# Altium PCB OSCILATOR.PcbDoc
Units mm, origin at the board's own origin, x right, y up, seen from the top; angles counter-clockwise.
Board outline 80 x 100 mm, 2 copper layers (Top Layer, Bottom Layer); 42 components, 22 nets, 82 pads, 3 vias.
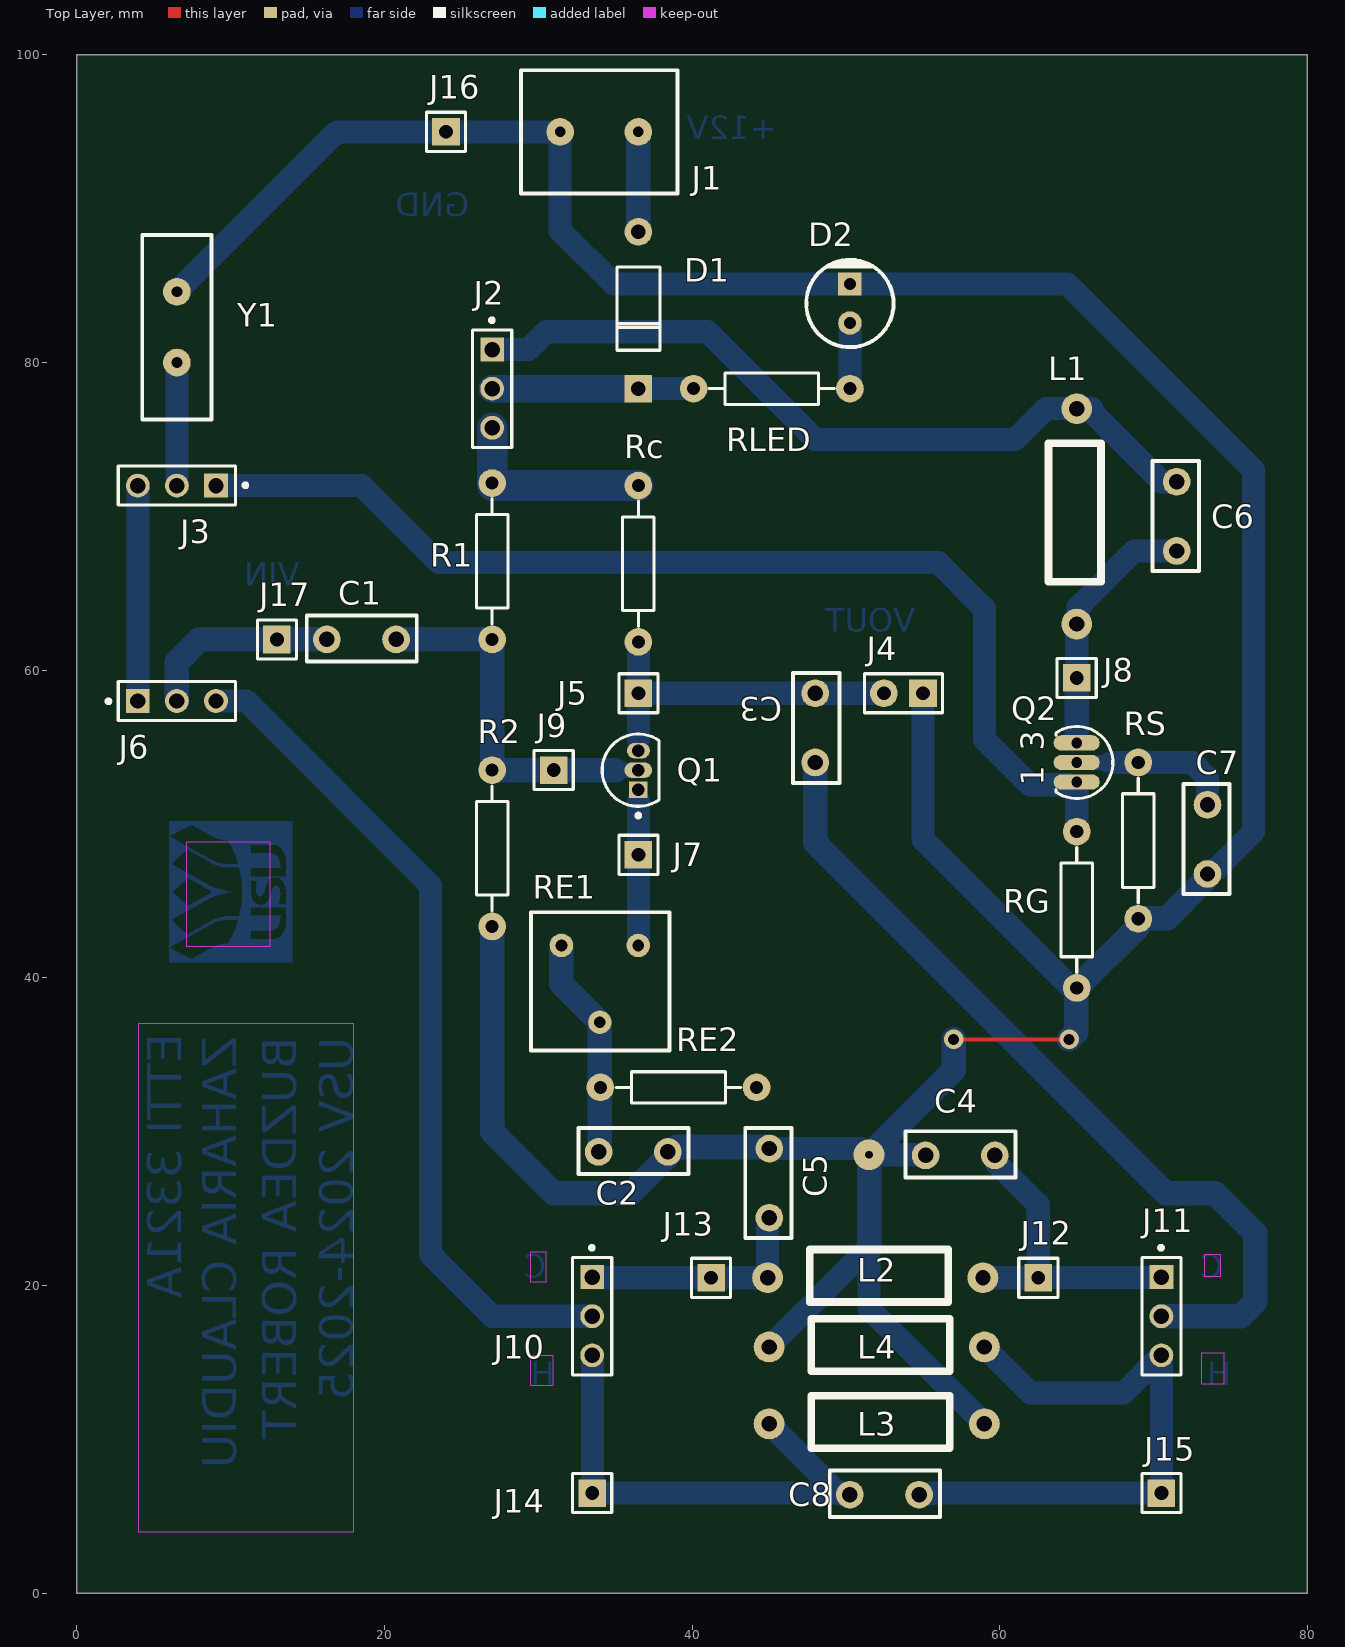
[diagram p0: Top Layer view]
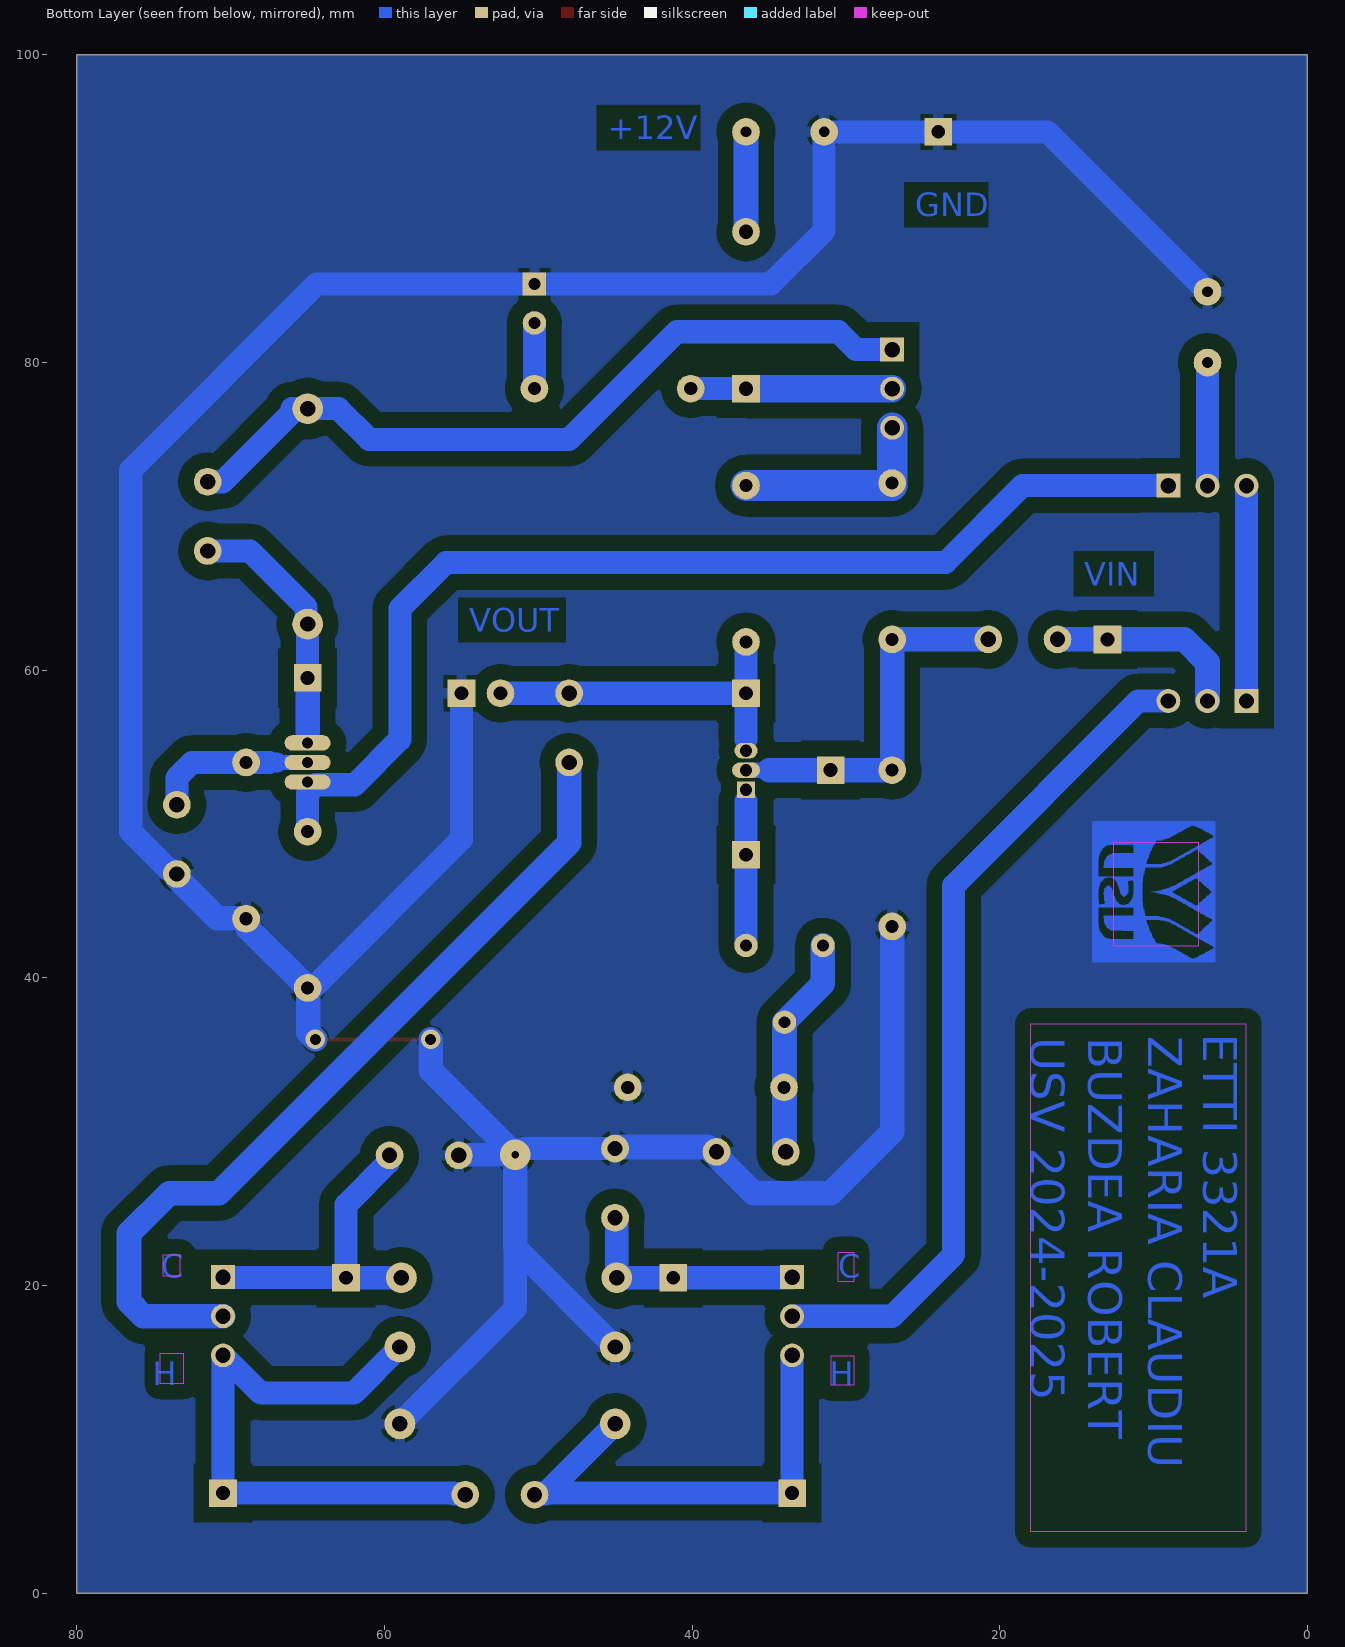
[diagram p1: Bottom Layer view, seen from below]
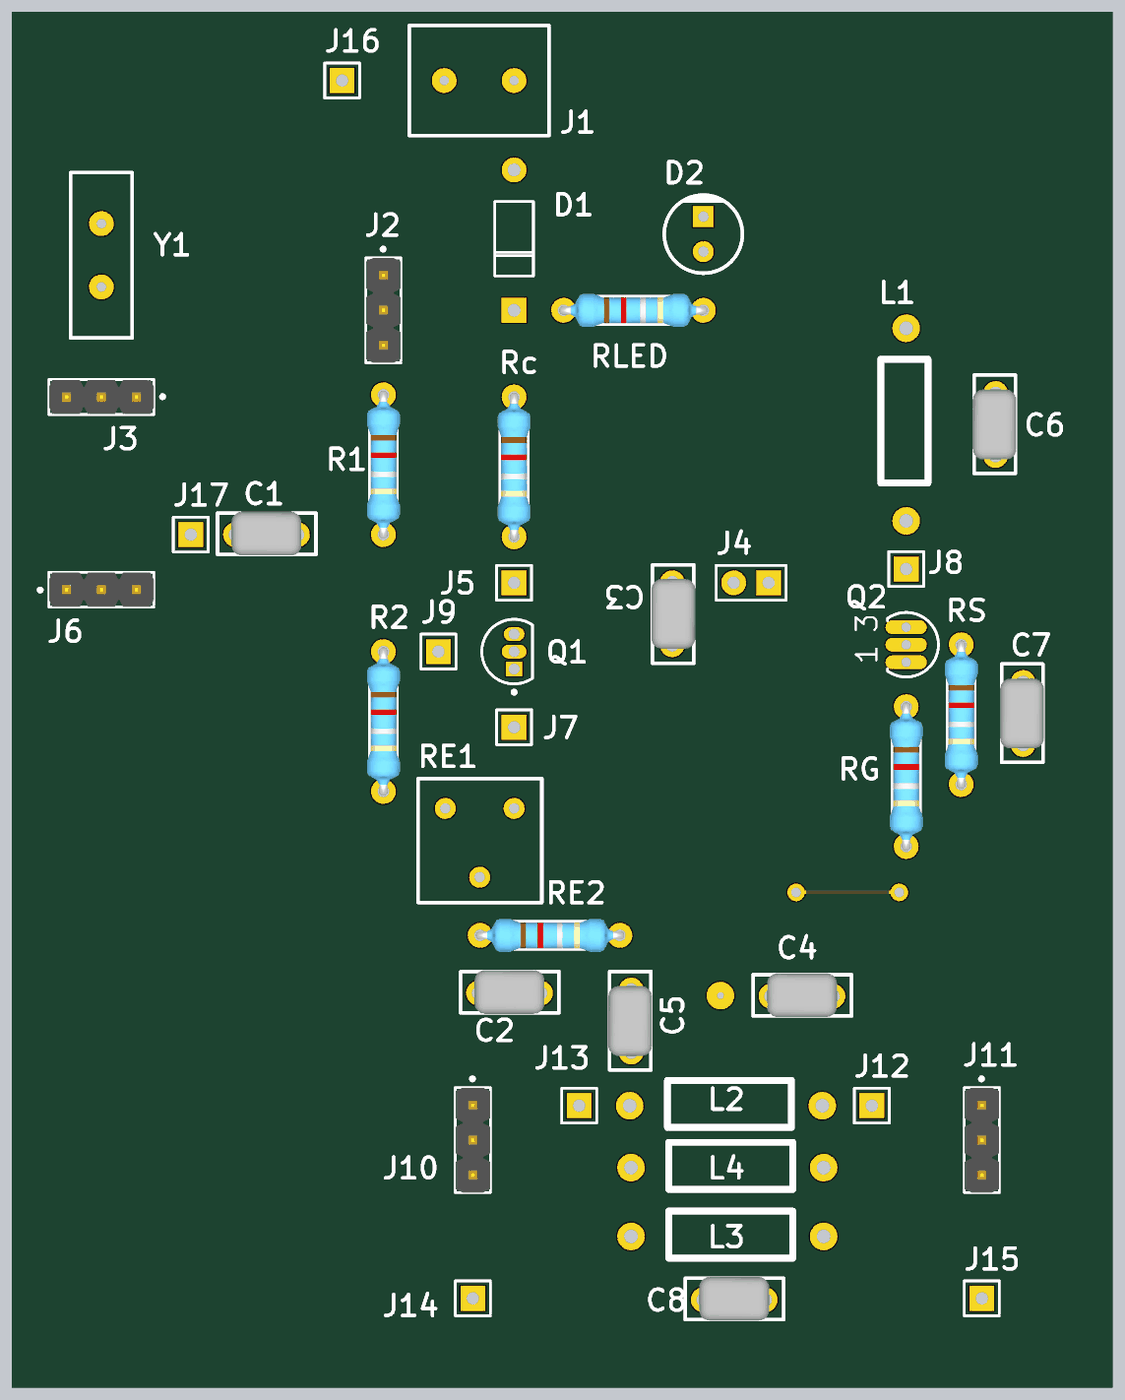
[diagram p2: 3D render of the assembled board from above, using the file's embedded part models]

## Layer stack, top to bottom
Top Solder: solder mask 0.0102, Solder Resist, Dk 3.5
Top Layer: signal copper 0.0356
Dielectric 1: dielectric 0.32, FR-4, Dk 4.8
Bottom Layer: signal copper 0.0356
Bottom Solder: solder mask 0.0102, Solder Resist, Dk 3.5

## Board outline
0,0 80,0 80,100 0,100

## Design rules (kind name [scope] priority, off if disabled: settings)
Clearance [All] p1: gap=0.2 ignorepadtopadclearanceinfootprint=FALSE except(0.1: Arc-Arc Arc-Track Track-Track; 1: Arc-Fill Arc-Poly Arc-Region Track-Fill Track-Poly Track-Region SMDPad-Fill SMDPad-Poly SMDPad-Region THPad-Fill THPad-Poly THPad-Region Via-Fill Via-Poly Via-Region Fill-Fill Fill-Poly Fill-Region Poly-Poly Poly-Region Region-Region)
PolygonConnect [All] p1: connectstyle=Relief reliefconductorwidth=0.7 reliefentries=4 polygonreliefangle="90 Angle" airgapwidth=0.254
RoutingVias [All] p1: holewidth=0.711 width=1.27 viastyle="Through Hole" minholewidth=0.711 minwidth=1.27 maxholewidth=0.711 maxwidth=1.27
SolderMaskExpansion [All] p1: expansion=0.102 istentingtop=FALSE
SupplyNets "Schematic Supply Nets_1" [InNet('GND')] p1: voltage=0.000
SupplyNets "Schematic Supply Nets" [InNet('+12')] p2: voltage=0.000
Width [All] p1: maxlimit=2 minlimit=0.254 preferedwidth=0.254 toplayer_maxwidth=0.254 minimp=50.000000 maximp=50.000000 favimp=50.000000
30 further rules are at their usual default settings.

## Components (designator, comment, footprint, x,y, rotation, side; value= is the part's Value field where it differs from the comment)
C1 "0.1uF" CAP4.5MM 18.5,62 r0 top
C2 "0.1uF" CAP4.5MM 36.166,28.683 r0 top
C3 "0.1uF (104)" CAP4.5MM 48,56.25 r270 top
C4 "1000pF (102)" CAP4.5MM 57.425,28.457 r0 top
C5 "0.01uF (103)" CAP4.5MM 45.014,26.652 r90 top
C6 "1000pF (102)" CAP4.5mm 71.5,70 r90 top
C7 "0.01uF (103)" CAP4.5mm 73.5,49 r90 top
C8 "1000pF (102)" CAP4.5MM 52.501,6.398 r0 top
D1 "Diode 1N4001" DO-41 36.5,78.3 r90 top
D2 "LED" LED 50.255,85.107 r270 top
J1 "VCC+12V" HDR_1X2_TE 36.5,95 r270 top
J2 "90120-0763" FP-90120-0763-MFG 27,78.3 r270 top
J3 "90120-0763" FP-90120-0763-MFG 6.5,72 r180 top
J4 "Vout" HDR_1X2_PIN 55,58.5 r0 top
J5 "TestPin" HDR_1X1_PIN 36.5,58.5 r0 top
J6 "90120-0763" FP-90120-0763-MFG 6.5,58 r0 top
J7 "TestPin" HDR_1X1_PIN 36.5,48 r0 top
J8 "TestPin" HDR_1X1_PIN 65,59.5 r0 top
J9 "TestPin" HDR_1X1_PIN 31,53.5 r0 top
J10 "90120-0763" FP-90120-0763-MFG 33.5,18 r270 top
J11 "90120-0763" FP-90120-0763-MFG 70.5,18 r270 top
J12 "TestPin" HDR_1X1_PIN 62.5,20.5 r0 top
J13 "TestPin" HDR_1X1_PIN 41.23,20.5 r0 top
J14 "TestPin" HDR_1X1_PIN 33.5,6.5 r0 top
J15 "TestPin" HDR_1X1_PIN 70.5,6.5 r0 top
J16 "TestPin GND" HDR_1x1_pin 24,95 r0 top
J17 "VIN" HDR_1x1_pin 13,62 r0 top
L1 "Inductor" INDUCTOR1 65,77 r270 top
L2 "Inductor" INDUCTOR1 58.903,20.5 r180 top
L3 "Inductor" INDUCTOR1 59,11 r180 top
L4 "Inductor" INDUCTOR1 59,16 r180 top
Q1 "2N3904" ONSC-TO-92-3-29-11 36.5,53.5 r90 top
Q2 "2N5458" 2N5458 65,54 r90 top
R1 "10k" RESISTOR 27,62 r90 top
R2 "3k3" RESISTOR 27,43.34 r90 top
Rc "2.7k" RESISTOR 36.5,61.84 r90 top
RE1 "Rpot100ohm" POTENTIOMETER 36.5,42.104 r180 top
RE2 "1k" RESISTOR 44.19,32.88 r180 top
RG "10M" RESISTOR 65,39.34 r90 top
RLED "1-8k" RESISTOR 50.255,78.3 r180 top
RS "2k7" RESISTOR 69,43.84 r90 top
Y1 "1MHz" XTAL 6.449,84.623 r180 top

## Footprints (in the part's own frame and the unit in brackets; to place one, negate y for a bottom-side part, rotate by r counter-clockwise, add the part's x,y. Pads: shape width x height; smd on the part's side, far side on the other; paste and mask are expansions set on the pad)
2N5458 [mm] "Jfet"
  oval 1x3 hole 0.7: 1(-1.27,0) 2(0,0) 3(1.27,0)
  silkscreen extent -2.34,-2.34 2.34,1.35
CAP4.5MM [mm]
  round 1.8 hole 1: 1(-2.25,0) 2(2.25,0)
  silkscreen extent -3.56,-1.44 3.6,1.57, body extent -2.54,-1.52 2.54,1.67, height 7.36
CAP4.5mm [mm]
  round 1.8 hole 1: 1(-2.25,0) 2(2.25,0)
  silkscreen extent -3.56,-1.44 3.6,1.57, body extent -2.54,-1.52 2.54,1.67, height 7.36
DO-41 [mm]
  round 1.8 hole 0.94: 1(10.2,0)
  rect 1.8x1.8 hole 0.94: 2(0,0)
  silkscreen extent 2.5,-1.4 7.9,1.4
FP-90120-0763-MFG [mm]
  rect 1.55x1.55 hole 1 paste-2539.97 mask+0: 1(-2.54,0)
  round 1.55 hole 1 paste-2539.97 mask+0: 2(0,0) 3(2.54,0)
  silkscreen extent -4.57,-1.27 3.81,1.27, body extent -3.91,-1.37 3.91,1.37, height 0.25
HDR_1X1_PIN [mm]
  rect 1.8x1.8 hole 0.9: 1(0,0)
  silkscreen extent -1.27,-1.27 1.27,1.27
HDR_1x1_pin [mm]
  rect 1.8x1.8 hole 0.9: 1(0,0)
  silkscreen extent -1.27,-1.27 1.27,1.27
HDR_1X2_PIN [mm]
  rect 1.8x1.8 hole 0.9: 1(0,0)
  round 1.8 hole 0.9: 2(-2.54,0)
  silkscreen extent -3.81,-1.27 1.27,1.27
HDR_1X2_TE [mm] "282836-2"
  round 1.8 hole 0.7: 1(0,0) 2(0,-5.08)
  silkscreen extent -4,-7.62 4,2.54
INDUCTOR1 [mm]
  round 2 hole 1: 1(0,0) 2(14,0)
  silkscreen extent 2.25,-1.84 11.25,1.58
LED [mil]
  rect 60x60 hole 30: 1(0,0)
  round 60 hole 30: 2(100,0)
  silkscreen extent -62,-112 162,112
ONSC-TO-92-3-29-11 [mm] "TO, 3-Leads, Body Dia 4.7mm, Pitch 1.27mm"
  rect 1.05x1.2 hole 0.8: 1(-1.27,0)
  oval 1x1.8 hole 0.8: 2(0,0)
  oval 1x1.5 hole 0.8: 3(1.27,0)
  silkscreen extent -3.07,-1.34 2.35,2.35, body extent -2.35,-1.33 2.36,2.36, height 7.87
POTENTIOMETER [mil]
  round 60 hole 30: 1(0,0) 2(98.43,196.85) 3(196.85,0)
  silkscreen extent -79,-85 275,269
RESISTOR [mm] "Res_2mm_AxialTH"
  round 1.8 hole 0.85: 1(0,0) 2(10.16,0)
  silkscreen extent 1.02,-1.02 9.14,1.02, body extent -0.3,-1.19 10.46,1.19, height 2.41
XTAL [mm]
  round 1.8 hole 0.7: 1(-0.051,0.023) 2(-0.051,4.623)
  silkscreen extent -2.3,-3.68 2.2,8.32

## Part data
C1 C2 C3 C4 C5 C6 C7 C8: library part "CAP 104", "104 cap"
D1: "1 Amp General Purpose Rectifier", Code_JEDEC=DO-204-AL, ComponentLink1Description="Manufacturer Link", ComponentLink1URL=http://www.fairchildsemi.com/, ComponentLink2Description=Datasheet, ComponentLink2URL=http://www.fairchildsemi.com/ds/1N%2F1N4001.pdf, DatasheetVersion=1998, LatestRevisionDate=17-Jul-2002, LatestRevisionNote="Re-released for DXP Platform.", PackageDescription="Diode, Axial; Body 5.2 x 2.7 mm (LxDia. max), Lead Dia. 0.86 mm (max)", PackageReference=DO-41, PackageVersion=Aug-1999, Published=8-Jun-2000, Publisher="Altium Limited"
J1: library part CON_1x2, "Connector, 2-Ports"
J2 J3 J6 J10 J11: library part CMP-04776-000084-1, "CONN HEADER VERT 3POS 2.54MM", Current Rating=3A, Manufacturer=Molex, Temperature="-55°C to +125°C", Temperature Range High=+125°C, Temperature Range Low=-55°C, Voltage Rating=350V, Automotive=No, Category=Conn, ComponentLink2Description=Datasheet, ComponentLink2URL=https://www.molex.com/webdocs/datasheets/pdf/en-us/0901200763_PCB_HEADERS.pdf, Conn Gender=Male, Conn Orientation=Vertical, Contact Material=Gold,Nickel, Device Class L1=Connectors, Device Class L2="Headers and Wire Housings", Device Class L3=unset, Digikey Description="CONN HEADER VERT 3POS 2.54MM", Footprint Url=https://www.molex.com/pdm_docs/sd/901200763_sd.pdf, Height=5.8mm, Lead Free=Yes, Manufacturer Part Number=90120-0763, Mouser Description="Board-To-Board Connector, C-Grid III 90120 Series, Through Hole, Header, 3, 2.54 mm", Number Of Contacts=3, Number Of Rows=1, Octopart=https://octopart.com/90120-0763-molex-655433, Package=90120-0763, Pitch=2.54mm, RoHS=TRUE
J4: library part HDR_1x2, "Header, 2-Pin"
J5 J7 J8 J9 J12 J13 J14 J15 J16 J17: library part "Test Pin"
Q1: library part CMP-2000-05562-1, "General Purpose Transistor, NPN Silicon, 200 mA, 60 V, -55 to 150 degC, 3-Pin TO-92, RoHS, Bulk", Collector- Base Voltage VCBO=60V, Collector- Emitter Voltage VCEO Max=40V, Collector-Emitter Saturation Voltage=0.3V, Emitter- Base Voltage VEBO=6V, Manufacturer=ONSemiconductor, Maximum DC Collector Current=0.2A, Maximum Operating Temperature=+150C, Maximum Power Dissipation=625mW, Minimum Operating Temperature=-65C, Package / Case=TO-92-3(TO-226), Package Description="3-Pin Transistor Outline, Body 4.825 x 3.685 mm, Pitch 1.27 mm", Package Reference=TO-92-3-29-11, Brand=ONSemiconductor, Configuration=Single, Datasheet URL=https://datasheet.ciiva.com/4725/2n3903-d-285841-4725808.pdf, Datasheet Version="Rev. 8, 08/2012", DC Collector/Base Gain hfe Min=60, Factory Pack Quantity=5000, Gain Bandwidth Product fT=270MHz, Manufacturer URL=http://www.onsemi.com/, Mounting Style=ThroughHole, Mounting Technology=ThroughHole, Packaging=Bulk, Product Category=BipolarTransistors-BJT, RoHS=Details, Transistor Polarity=NPN
Q2: library part "JFET N 2N5458"
R1 R2 Rc RE2 RG RLED RS: library part "Resistor 0.25W 5mm", "0.25W,Axial"
RE1: library part Rpot
Y1: library part Xtal

## Via types
v1: diameter 1.27, hole 0.711, Top Layer to Bottom Layer, 2 vias
v2: diameter 2, hole 0.5, Top Layer to Bottom Layer, 1 vias

## Nets (pads, with @x,y where several pads share a name; then routed paths per layer and width w, separated by ;. In a path a pad name is that pad's centre, name@x,y a point inside that pad or via, vN(x,y) a via of type N, cw(c..) or ccw(c..) an arc to the next point about the centre after c; other vN are vias at no path point)
+12: C6.2 J2.1 L1.1 | length 50.9
  Bottom Layer w1.5: J2.1 29.34,80.84 30.5,82 41,82 48,75 61,75 63,77 L1.1 L1.1@65.77,77 ; 66,77 L1.1@65.77,77 ; C6.2 70.52,72.25 L1.1@65.77,77
Coplitts/Hartley: J6.3 J10.2 | length 55.1
  Bottom Layer w1.5: J6.3 11,58 23,46 23,22 27,18 J10.2
GND: C2.2 C4.1 C5.2 C7.1 D2.1 J1.2 J4.1 J16.1 L3.1 L4.2 R2.1 RE2.1 RG.1 RS.1 Y1.1 | length 245.9
  Top Layer w0.254: v1(57,36) v1(64.5,36)
  Bottom Layer w1.5: Y1.1 16.9,95 J16.1 J1.2 31.42,88.58 34.893,85.107 D2.1 64.393,85.107 76.5,73 76.5,49.5 74,47 73.831,47 73.581,46.75 C7.1 ; L4.2@44.896,15.896 51.5,22.5 51.5,18.5 L3.1 ; C5.2 50.963,28.902 51.365,28.5 v2(51.5,28.5) C4.1@55.25,28.5 ; J4.1 55,49 64.603,39.397 64.943,39.397 RG.1 ; L3.1@58.903,10.853 L3.1@58.954,10.904
  Bottom Layer w1.6: R2.1 27,30 31,26 36,26 38.378,28.378 38.378,28.645 38.455,28.721 38.721,28.721 39,29 C5.2@45,29 ; C5.2@45,28.97 C5.2@45,28.994 ; 51.5,22.5 v2(51.5,28.5) ; v2@51.577,28.577 57,34 v1(57,36) ; v1(64.5,36) 64.962,36.462 64.962,39.302 RG.1 68.962,43.302 68.962,43.802 69.038,43.878 70.878,43.878 73.462,46.462 73.462,46.712 C7.1
NetC1_1: C1.1 J6.2 J17.1 | length 12.9
  Bottom Layer w1.6: J6.2 6.5,60.5 8,62 J17.1 C1.1
NetC1_2: C1.2 J9.1 Q1.2 R1.1 R2.2 | length 24.3
  Bottom Layer w1: 35,53.5 Q1.2
  Bottom Layer w1.6: C1.2 R1.1 R2.2 J9.1 35,53.5
NetC2_1: C2.1 RE1.2 RE1.3 RE2.2 | length 14.5
  Bottom Layer w1.6: RE1.3 31.5,39.604 RE1.2 34,32.5 34,28.821 33.916,28.737 C2.1
NetC3_1: C3.1 J4.2 J5.1 Q1.3 Rc.1 | length 22.4
  Bottom Layer w1.5: 36.5,55.5 36.5,56 J5.1 ; Rc.1 J5.1 ; J4.2@52.5,58.46 J4.2 47.593,58.5 J5.1
NetC3_2: C3.2 J11.2 | length 55.3
  Bottom Layer w1.6: C3.2 48,48.786 70.786,26 74,26 76.611,23.389 76.611,18.937 75.674,18 J11.2
NetC4_2: C4.2 J11.1 J12.1 L2.1 | length 20.3
  Bottom Layer w1.5: L2.1 J12.1 ; C4.2@59.75,28 62.5,25.25 J12.1 ; J11.1 70.48,20.52 62.52,20.52 J12.1
NetC5_1: C5.1 J10.1 J13.1 L2.2 | length 15.4
  Bottom Layer w1.5: J10.1 33.54,20.5 J13.1 L2.2 44.903,24.209 45.014,24.321 C5.1
NetC6_1: C6.1 J8.1 L1.2 Q2.3 | length 16.8
  Bottom Layer w1: Q2.3 65,56
  Bottom Layer w1.5: J8.1 L1.2 65.096,63.096 65.096,64.096 68.75,67.75 C6.1
  Bottom Layer w1.6: 65,56 J8.1
NetC7_2: C7.2 Q2.2 RS.2 | length 10.7
  Bottom Layer w1: Q2.2 67,54
  Bottom Layer w1.3: 67,54 67.5,54
  Bottom Layer w1.5: 67.5,54 RS.2 72.5,54 73.5,53 C7.2
NetC8_1: C8.1 J10.3 J14.1 L3.2 | length 32.9
  Bottom Layer w1.5: J14.1 50.067,6.5 50.17,6.398 C8.1 50.193,6.455 49.545,6.455 L3.2 ; J10.3@33.516,15.444 33.51,15.437 33.524,15.422 J14.1@33.524,6.524
NetC8_2: C8.2 J11.3 J15.1 L4.1 | length 38.5
  Bottom Layer w1.5: C8.2 54.808,6.455 55.455,6.455 55.5,6.5 J15.1 J11.3 68.04,13 62,13 L4.1
NetD1_1: D1.1 J1.1 | length 6.5
  Bottom Layer w1.6: D1.1 J1.1
NetD1_2: D1.2 J2.2 RLED.2 | length 13.1
  Bottom Layer w1.5: D1.2 RLED.2
  Bottom Layer w1.8: J2.2 D1.2
NetD2_2: D2.2 RLED.1 | length 4.3
  Bottom Layer w1.5: RLED.1 D2.2
NetJ2_3: J2.3 R1.2 Rc.2 | length 13.3
  Bottom Layer w2: J2.3 27,72 28,72 33,72 33.5,72 Rc.2
NetJ3_2: J3.2 Y1.2 | length 8
  Bottom Layer w1.5: J3.2 Y1.2
NetJ7_1: J7.1 Q1.1 RE1.1 | length 9.4
  Bottom Layer w1.5: RE1.1 J7.1 36.5,51.5
OSC1: J3.3 J6.1 | length 14
  Bottom Layer w1.5: J6.1 J3.3
OSC2: J3.1 Q2.1 RG.2 | length 71.7
  Bottom Layer w1.5: J3.1 18.533,72 23.533,67 56,67 59,64 59,55.5 61.95,52.55 64.45,52.55 65,52 RG.2

## Polygon pours and split planes (outlines as drawn)
GND on Bottom Layer "GND_L02_P000" (solid, pour order 0): 0,100 80,100 80,0 0,0

## Keep-outs
Keep-Out Layer:
  rectangle: 73.305,20.61 74.377,22.012
  rectangle: 73.083,13.61 74.579,15.595
  rectangle: 29.483,13.518 30.96,15.418
  rectangle: 29.483,20.233 30.511,22.163
  rectangle: 7.106,42.048 12.584,48.809
  rectangle: 4,4 18,37

## Other copper
Bottom Layer:
  region net GND: 5 vertices and 7 holes, not listed, extent 6,41 14,50.187
  text "+12V" at 45.5,94.5 h1.52
  text "GND" at 25.5,89.5 h1.52
  text "VIN" at 14.5,65.5 h1.52
  text "VOUT" at 54.5,62.5 h1.52
  text "ETTI 3321A" at 6.775,36.35 h2.2 r90
  text "ZAHARIA CLAUDIU" at 10.35,36.2 h2.2 r90
  text "BUZDEA ROBERT" at 14.25,36.125 h2.2 r90
  text "USV 2024-2025" at 17.975,36.125 h2.2 r90
  text "C" at 30.5,20.5 h1.52
  text "C" at 74.5,20.5 h1.52
  text "H" at 29.5,13.5 h1.52
  text "H" at 73.5,13.5 h1.52

## Silkscreen, mask and mechanical layers (free items; w line width, h text height)
Mechanical 1:
  the board outline again, w0.254

## Text inside footprints (layer, text, board x,y; h text height)
Q2: Top Overlay "1" at 62.841,52.476 h1.5 r90; Top Overlay "3" at 62.841,54.762 h1.5 r90